# Altium PCB sync_rectification_module.PcbDoc
Units mm, origin at the board's own origin, x right, y up, seen from the top; angles counter-clockwise.
Board outline 38 x 33 mm, 2 copper layers (Top Layer, Bottom Layer), stack 1.636 mm thick; 17 components, 16 nets, 76 pads, 40 vias.
Unrouted connection lines stored in the file: 19.
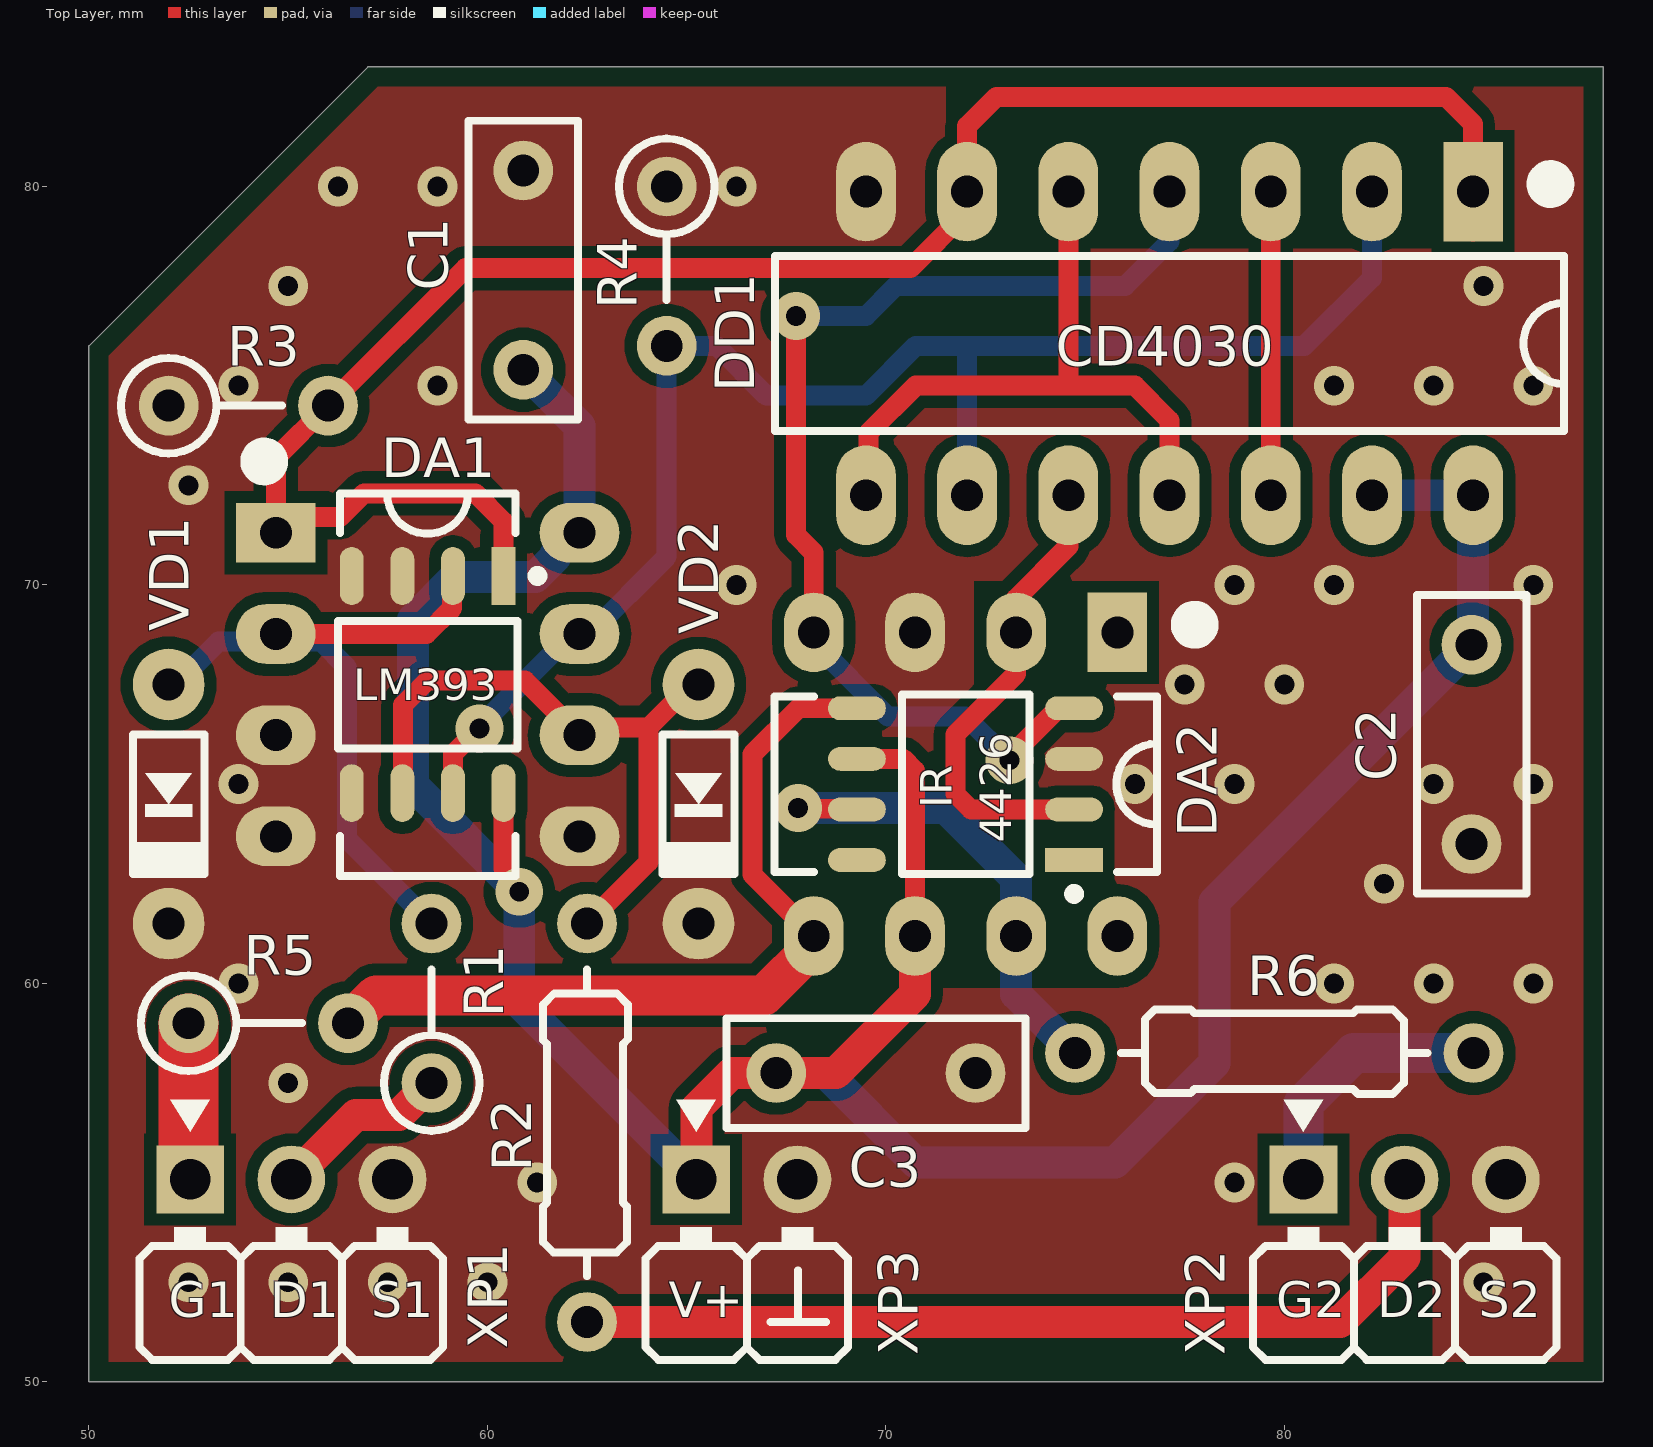
[diagram p0: Top Layer view]
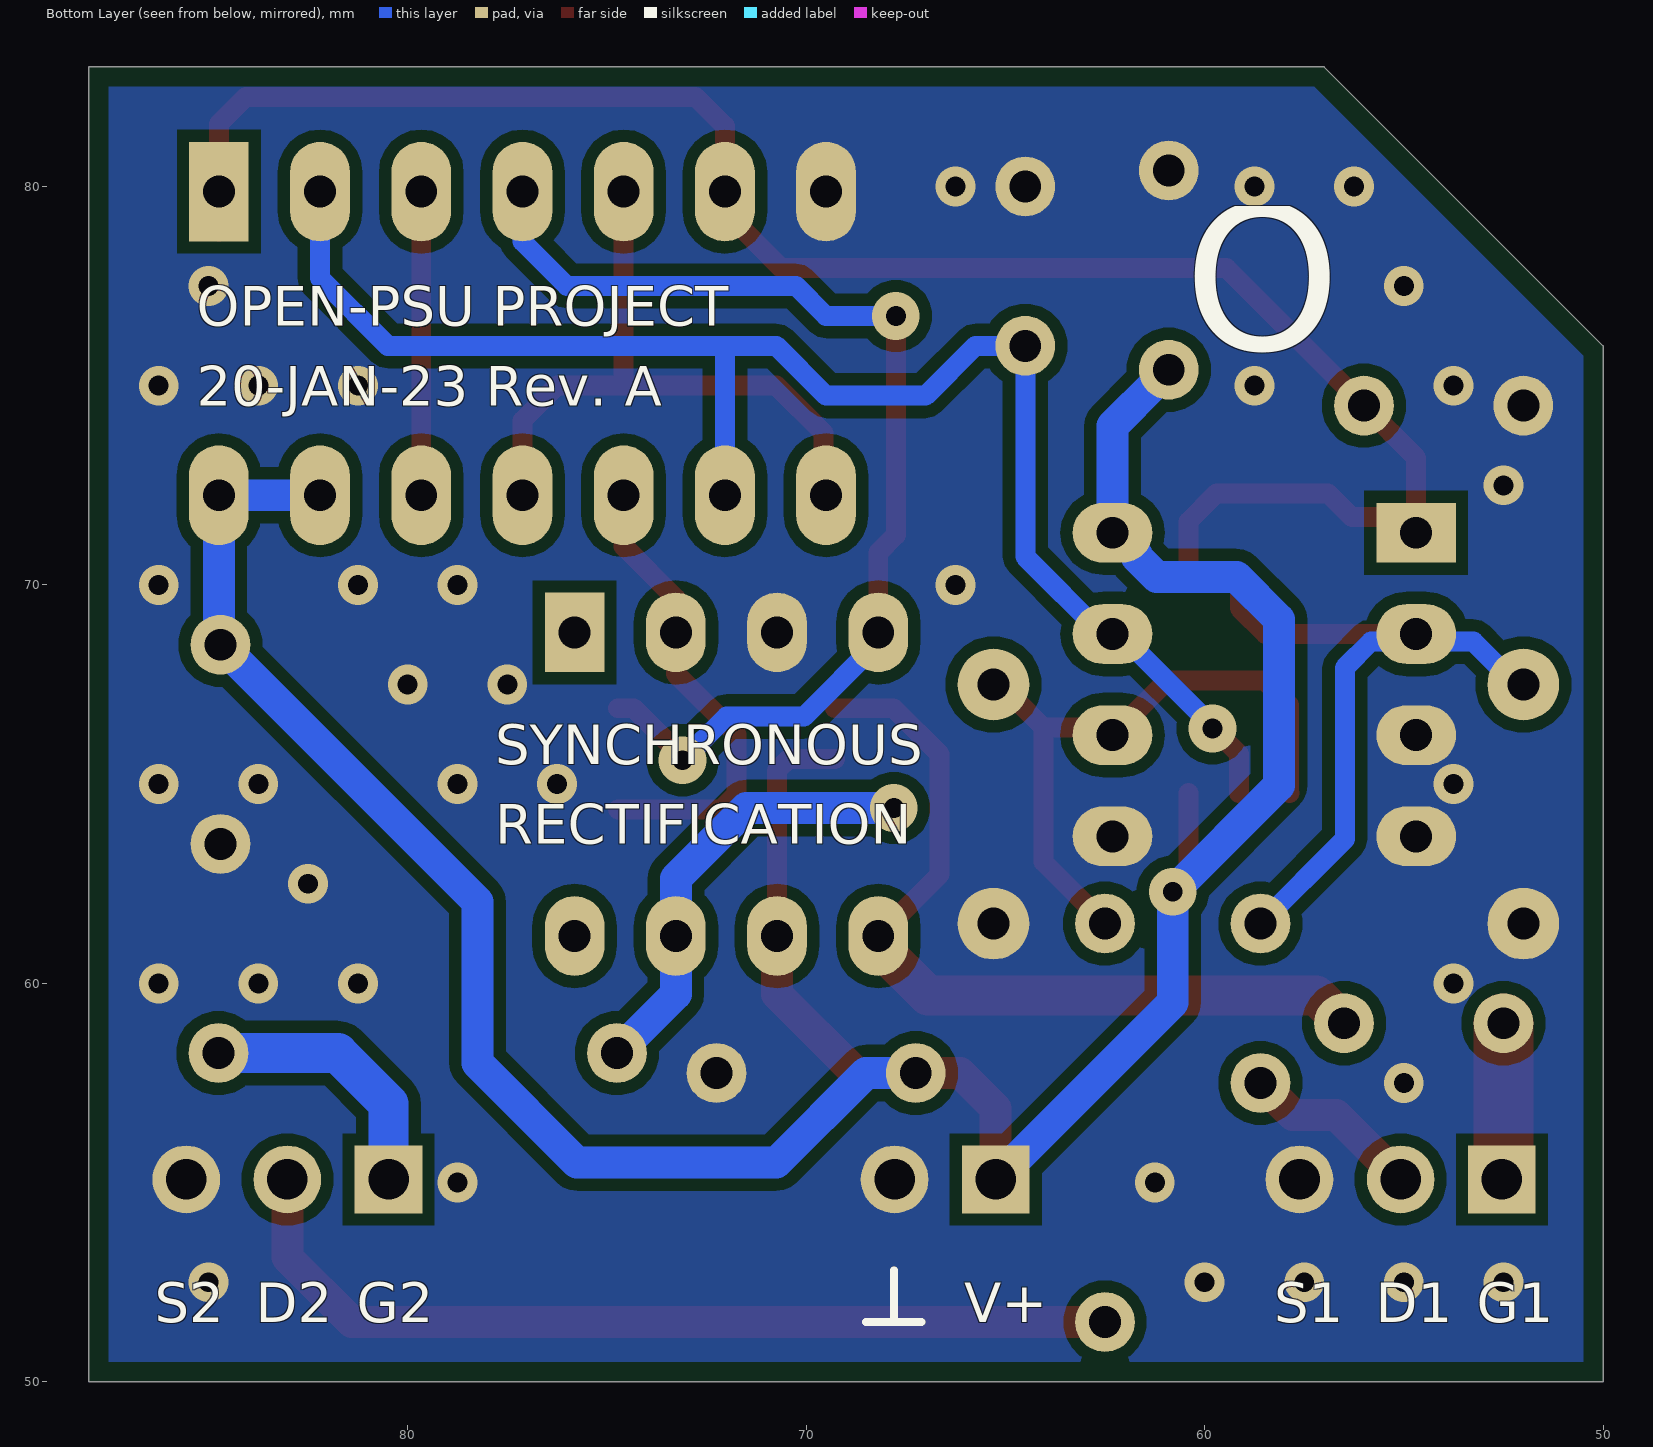
[diagram p1: Bottom Layer view, seen from below]
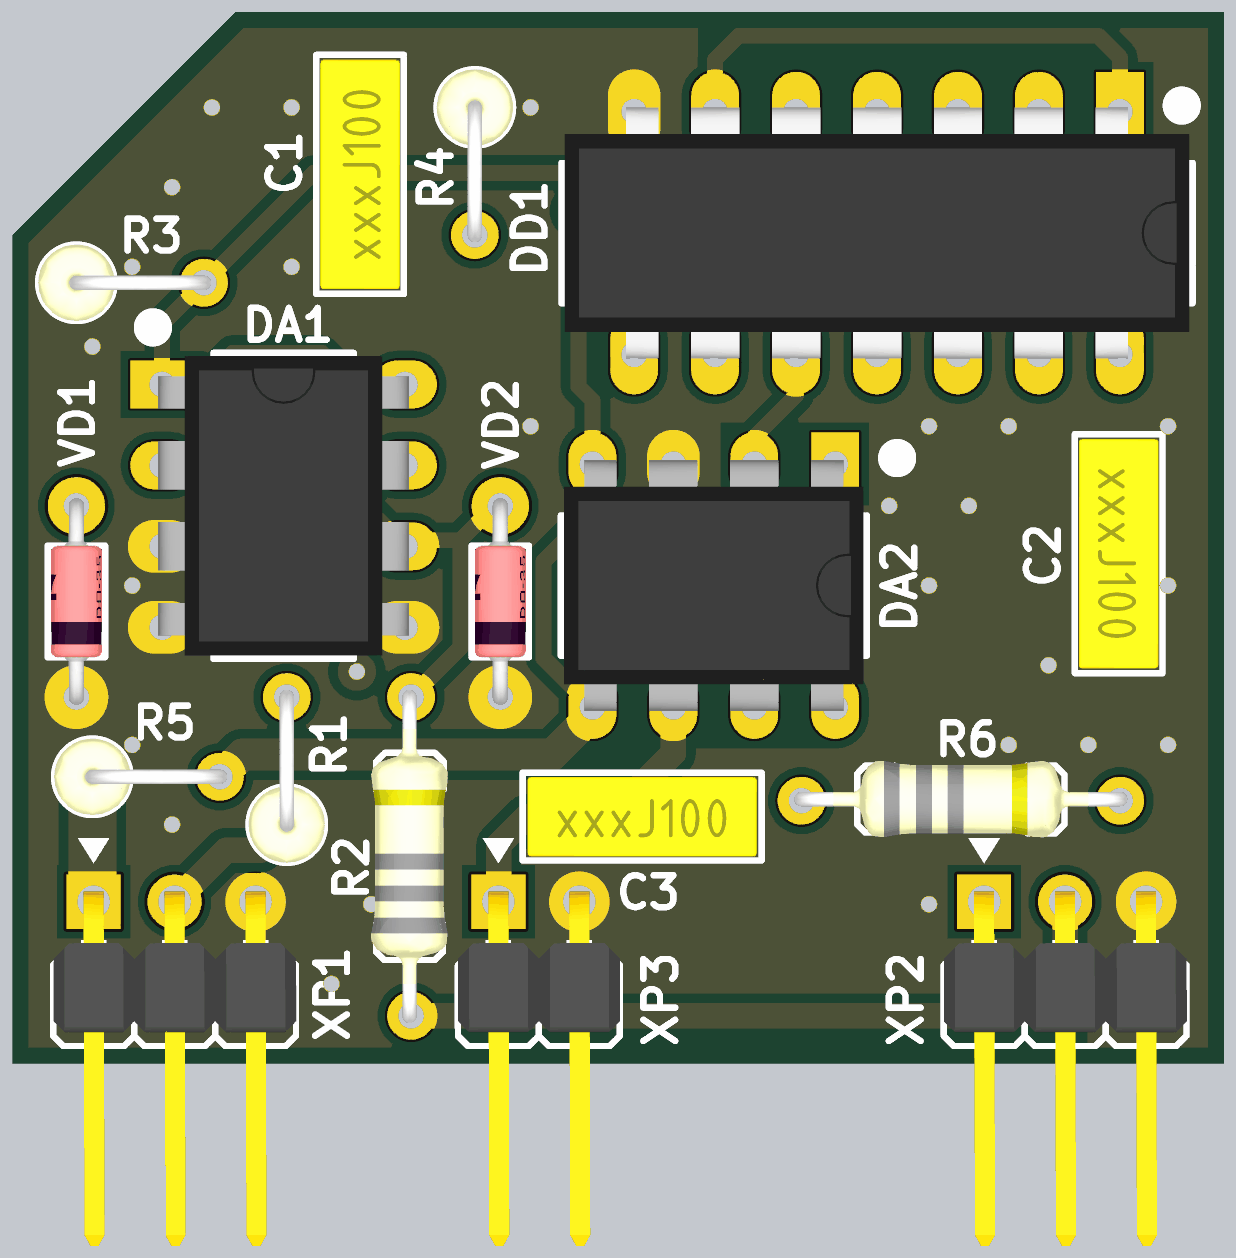
[diagram p2: 3D render of the assembled board from above, using the file's embedded part models]

## Layer stack, top to bottom
Top Solder: solder mask 0.025, Solder Resist, Dk 3.5
Top Layer: signal copper 0.018
Dielectric 1: dielectric 1.6, FR-4, Dk 4.8
Bottom Layer: signal copper 0.018
Bottom Solder: solder mask 0.025, Solder Resist, Dk 3.5

## Board outline
50,50 50,76 57,83 88,83 88,50

## Design rules (kind name [scope] priority, off if disabled: settings)
Clearance [All] p1: gap=0.3 ignorepadtopadclearanceinfootprint=FALSE
PlaneClearance [All] p1: clearance=0.5
PlaneConnect [All] p1: planeconnectstyle=Direct reliefexpansion=0.508 reliefentries=4 reliefconductorwidth=0.254 reliefairgap=0.254
PolygonConnect [All] p1: connectstyle=Direct reliefconductorwidth=0.254 reliefentries=4 polygonreliefangle="90 Angle" airgapwidth=0.254
RoutingVias [All] p1: holewidth=0.5 width=1 viastyle="Through Hole" minholewidth=0.5 minwidth=1 maxholewidth=5 maxwidth=2.5
SilkToSilkClearance [All] p1: silktosilkclearance=0.2
SilkToSolderMaskClearance [IsPad] p1: minsilkscreentomaskgap=0.2 clearancetoexposedcopper=TRUE
SolderMaskExpansion [All] p1: expansion=0.1 istentingtop=FALSE
Width [All] p1: maxlimit=2.5 minlimit=0.3 preferedwidth=0.5 minimp=50.000000 maximp=50.000000 favimp=50.000000
26 further rules are at their usual default settings.

## Components (designator, comment, footprint, x,y, rotation, side; value= is the part's Value field where it differs from the comment)
C1 "0.1u" CL23B_7.2x2.5 60.9,77.9 r90 top
C2 "0.1u" CL23B_7.2x2.5 84.7,66 r270 top
C3 "0.1u" CL23B_7.2x2.5 69.75,57.75 r0 top
DA1 "LM393P" DIP-8P-M01_with_SO8 58.5,67.5 r0 top
DA2 "IR4426PbF" DIP-8P-M01_with_SO8 72,65 r270 top
DD1 "CD4030BE" DIP-14P-M02 77.12,76.06 r270 top
R1 "2k" CFR-25(VERTICAL) 58.6,59.5 r270 top
R2 "2k" CFR-25 62.5,56.5 r90 top
R3 "4.7k" CFR-25(VERTICAL) 54,74.5 r180 top
R4 "4.7k" CFR-25(VERTICAL) 64.5,78 r90 top
R5 "3.6" CFR-25(VERTICAL) 54.5,59 r180 top
R6 "3.6" CFR-25 79.75,58.25 r0 top
VD1 "1N4148" "DO-35 GLASS LIGHT RED" 52,64.5 r90 top
VD2 "1N4148" "DO-35 GLASS LIGHT RED" 65.3,64.5 r90 top
XP1 "PLS-3R" PLS-3R 52.54,55.08 r0 top
XP2 "PLS-3R" PLS-3R 80.48,55.08 r0 top
XP3 "PLS-2R" PLS-2R 65.24,55.08 r0 top

## Footprints (in the part's own frame and the unit in brackets; to place one, negate y for a bottom-side part, rotate by r counter-clockwise, add the part's x,y. Pads: shape width x height; smd on the part's side, far side on the other; paste and mask are expansions set on the pad)
CFR-25 [mm] "Carbon Film Resistors 1/4W"
  round 1.5 hole 0.8 mask+0.075: 1(-5,0) 2(5,0)
  silkscreen extent -3.85,-1.02 3.85,1.1, body extent -5.23,-1.15 5.22,1.25, height 3.7
CFR-25(VERTICAL) [mm] "Carbon Film Resistors 1/4W"
  round 1.5 hole 0.8 mask+0.075: 1(-2,0) 2(2,0)
  silkscreen extent -0.85,-1.2 3.2,1.2, body extent -2.23,-1.2 3.2,1.2, height 9.84
CL23B_7.2x2.5 [mm] "Box-type 7.2x2.5x6.5mm"
  round 1.5 hole 0.8 mask+0.075: 1(-2.5,0) 2(2.5,0)
  silkscreen extent -3.75,-1.38 3.75,1.38, body extent -3.6,-1.25 3.6,1.25, height 6.55
DIP-8P-M01_with_SO8 [mm] "Plastic DIP, 8 pin, lead pitch 2.54mm (0.1\"), row spacing 7.62mm (0.3\")."
  rect 2x1.5 hole 0.8 mask+0.075: 1(-3.81,3.81)
  rect 0.6x1.45 smd paste+0 mask+0.05: 1(1.905,2.725)
  oval 2x1.5 hole 0.8 mask+0.075: 2(-3.81,1.27) 3(-3.81,-1.27) 4(-3.81,-3.81) 5(3.81,-3.81) 6(3.81,-1.27) 7(3.81,1.27) 8(3.81,3.81)
  oval 0.6x1.45 smd paste+0 mask+0.05: 2(0.635,2.725) 3(-0.635,2.725) 4(-1.905,2.725) 5(-1.905,-2.725) 6(-0.635,-2.725) 7(0.635,-2.725) 8(1.905,-2.725)
  silkscreen extent -4.4,-4.8 2.88,5.9, body extent -3.94,-4.7 3.93,4.7, height 4.36
DIP-14P-M02 [mm] "Plastic DIP, 14 pin, lead pitch 2.54mm (0.1\"), row spacing 7.62mm (0.3\")"
  rect 2.5x1.5 hole 0.8 mask+0.075: 1(-3.81,7.62)
  oval 2.5x1.5 hole 0.8 mask+0.075: 2(-3.81,5.08) 3(-3.81,2.54) 4(-3.81,0) 5(-3.81,-2.54) 6(-3.81,-5.08) 7(-3.81,-7.62) 8(3.81,-7.62) 9(3.81,-5.08) 10(3.81,-2.54) 11(3.81,0) 12(3.81,2.54) 13(3.81,5.08) 14(3.81,7.62)
  silkscreen extent -4.3,-9.9 2.2,9.9, body extent -3.94,-9.8 3.93,9.8, height 4.36
"DO-35 GLASS LIGHT RED" [mm]
  round 1.8 hole 0.8: 1(-3,0) 2(3,0)
  silkscreen extent -1.75,-0.9 1.75,0.95, body extent -3.24,-0.8 3.24,0.8, height 2.3
PLS-2R [mm]
  rect 1.7x1.7 hole 1.02: 1(0,0)
  round 1.7 hole 1.02: 2(2.54,0)
  silkscreen extent -1.27,-4.53 3.81,1.99, body extent -1.27,-10.8 3.82,0.32, height 3.09
PLS-3R [mm]
  rect 1.7x1.7 hole 1.02: 1(0,0)
  round 1.7 hole 1.02: 2(2.54,0) 3(5.08,0)
  silkscreen extent -1.27,-4.53 6.35,1.99, body extent -1.27,-10.8 6.36,0.32, height 3.09

## Part data
C1 C2 C3: library part CL23B, "Box-type metallized polyester film capacitor", Dielectric=Polyester, Tolerance="± * %", Voltage=63V, Package=CL23B, Value on schem=0.1u
DA1: "Dual Comparator", Manufacturer="Texas Instruments", Package=DIP-8, Part Number=LM393P
DA2: "DUAL LOW SIDE DRIVER", Manufacturer="International Rectifier", Package=SOIC-8, Part Number=IR4426PbF
DD1: "Quad XOR-Gate", Manufacturer="Texas Instruments", Package=DIP-14, Part Number=CD4030BE
R1 R2: library part CF25, "Resistor 1/4W", Manufacturer=Yageo, Package=1/4, Part Number=MFR-25FTF52-2K, Temperature coefficient="±100 ppm/°C", Tolerance="± 1 %", Voltage=250V, Value on schem=2k
R3 R4: library part CF25, "Resistor 1/4W", Manufacturer=Yageo, Package=1/4, Part Number=MFR-25FTF52-4K7, Temperature coefficient="±100 ppm/°C", Tolerance="± 1 %", Voltage=250V, Value on schem=4.7k
R5 R6: library part CF25, "Resistor 1/4W", Manufacturer=Yageo, Package=1/4, Part Number=MFR-25FTF52-3R6, Temperature coefficient="±100 ppm/°C", Tolerance="± 1 %", Voltage=250V, Value on schem=3.6
VD1 VD2: "High-speed diode", Package=DO-35, Part Number=1N4148

## Via types
v1: diameter 1, hole 0.5, Top Layer to Bottom Layer, tented both sides, 35 vias
v2: diameter 1.2, hole 0.5, Top Layer to Bottom Layer, tented both sides, 5 vias

## Nets (pads, with @x,y where several pads share a name; then routed paths per layer and width w, separated by ;. In a path a pad name is that pad's centre, name@x,y a point inside that pad or via, vN(x,y) a via of type N, cw(c..) or ccw(c..) an arc to the next point about the centre after c; other vN are vias at no path point)
D1: R1.2 XP1.2 | length 4.5
  Top Layer w0.8: XP1.2 56.695,56.695 57.781,56.695 R1.2@58.587,57.5
D2: R2.1 XP2.2 | length 23.2
  Top Layer w0.8: R2.1 81.4,51.5 83.02,53.12 XP2.2
G1: R5.2 XP1.1 | length 3.9
  Top Layer w1.5: R5.2 52.5,55.12 XP1.1
G2: R6.2 XP2.1 | length 6.7
  Top Layer w1: XP2.1 XP2.1@80.49,55.09
  Bottom Layer w1: XP2.1 80.48,56.98 81.75,58.25 R6.2
GND: C1.2 C2.2 C3.2 DA1.3 DA1.4 DA1.5 DA2.3 DD1.7 R3.2 R4.2 VD1.1 VD2.1 XP1.3 XP2.3 XP3.2
  other v1: 52.5,52.5 55,52.5 57.5,52.5 60,52.5 85,52.5 61.25,55 78.75,55 55,57.5 53.75,60 81.25,60 83.75,60 86.25,60 82.5,62.5 53.75,65 76.25,65 78.75,65 83.75,65 86.25,65 77.5,67.5 80,67.5 66.25,70 78.75,70 81.25,70 86.25,70 52.5,72.5 53.75,75 58.75,75 81.25,75 83.75,75 86.25,75 55,77.5 85,77.5 56.25,80 58.75,80 66.25,80
NetDA1_1: DA1.1 DD1.1 DD1.6 R3.1 | length 47.1
  Top Layer w0.5: DA1.1@60.405,70.225 60.405,71.595 59.7,72.3 56.9,72.3 56.3,71.7 55.08,71.7 54.69,71.31 54.69,73.19 R3.1 59.45,77.95 70.62,77.95 DD1.6@72.04,79.37 ; DD1.6 72.04,81.513 72.777,82.25 84.056,82.25 84.74,81.566 DD1.1 ; DD1.1@84.49,79.62 84.74,79.37 DD1.1@84.74,78.87
NetDA1_2: DA1.2 R1.1 VD1.2 | length 18.4
  Top Layer w0.5: DA1.2@54.69,68.77 58.47,68.77 59.116,69.416 59.116,70.206 DA1.2@59.135,70.225
  Bottom Layer w0.5: VD1.2 52.176,67.5 53.255,68.579 54.499,68.579 54.69,68.77 54.881,68.579 55.821,68.579 56.481,67.919 56.481,63.619 R1.1 ; R1.1@58.8,61.7 R1.1@59,61.5
NetDA1_6: DA1.6 R2.2 VD2.2 | length 16.5
  Top Layer w0.5: DA1.6@57.865,64.775 57.884,64.794 57.884,66.984 58.5,67.6 60.94,67.6 62.31,66.23 62.501,66.421 64.045,66.421 ; R2.2 64.045,63.045 64.045,66.421 ; VD2.2 65.124,67.5 64.045,66.421
NetDA1_7: DA1.7 DD1.2 DD1.9 R4.1 | length 39.1
  Top Layer w0.5: DA1.7@59.135,64.775 59.135,65.757 59.778,66.4 v2(59.8,66.4)
  Bottom Layer w0.5: v2(59.8,66.4) 59.8,66.455 62.115,68.77 62.31,68.77 62.56,68.77 64.5,70.71 R4.1 65.75,76 67,74.75 69.5,74.75 70.75,76 72.04,76 ; DD1.9@72.04,73 72.04,76 ; DD1.2@82.2,80.62 82.2,77.7 80.5,76 72.04,76
NetDA2_2: DA2.2 DD1.10 | length 11.8
  Top Layer w0.5: DD1.10 74.58,70.971 73.27,69.661 73.27,68.81 73.27,67.77 71.75,66.25 71.75,64.75 72.135,64.365 DA2.2@74.725,64.365
NetDA2_4: DA2.4 DD1.4 | length 28.9
  Top Layer w0.5: v2(67.75,76.75) 67.75,71.25 68.19,70.81 DA2.4@68.19,68.81 ; v2(73.1,65.6) 73.1,65.678 74.327,66.905 DA2.4@74.725,66.905
  Bottom Layer w0.5: v2(67.75,76.75) 69.5,76.75 70.25,77.5 76,77.5 77.12,78.62 DD1.4 DD1.4@77.12,80.62 ; DA2.4@68.19,68.81 68.19,68.56 70.05,66.7 72,66.7 v2(73.1,65.6)
NetDA2_5: DA2.5 R5.1 | length 21
  Top Layer w0.5: DA2.5@68.19,61.19 66.65,62.73 66.65,65.75 67.805,66.905 DA2.5@69.275,66.905
  Top Layer w1: R5.1 57.2,59.7 66.95,59.7 68.19,60.94 DA2.5@68.19,61.19
NetDA2_7: DA2.7 R6.1 | length 12.7
  Top Layer w0.5: v2(67.8,64.4) 67.817,64.383 69.258,64.383 DA2.7@69.275,64.365
  Bottom Layer w0.8: v2(67.8,64.4) 71.504,64.4 73.27,62.634 73.27,61.19 73.27,59.73 R6.1
NetDD1_3: DD1.3 DD1.12 | length 7.6
  Top Layer w0.5: DD1.12@79.66,71.25 DD1.3@79.66,78.87
NetDD1_5: DD1.5 DD1.8 DD1.11 | length 17.6
  Top Layer w0.5: DD1.8@69.5,71.25 69.5,71.75 DD1.8@69.75,72 ; DD1.8 69.561,72.311 69.561,73.811 70.75,75 74.58,75 ; DD1.5 74.58,75 ; DD1.11 77.12,74.13 76.25,75 74.58,75
VCC_STANDBY_12V0P: C1.1 C2.1 C3.1 DA1.8 DA2.6 DD1.13 DD1.14 XP3.1 | length 76.6
  Top Layer w0.5: 60.405,62.884 DA1.8@60.405,64.775 ; DA2.6@69.275,65.635 70.437,65.635 70.73,65.342 DA2.6@70.73,61.19
  Top Layer w0.8: XP3.1 65.25,55.09 65.25,56.865 66.135,57.75 C3.1 68.75,57.75 70.73,59.73 DA2.6@70.73,61.19
  Bottom Layer w0.8: C1.1@60.9,75.1 61.2,75.1 62.31,73.99 62.31,71.31 62.249,71.31 61.71,70.771 61.71,70.71 61.2,70.2 59.2,70.2 58.135,69.135 58.135,64.965 v2(60.8,62.3) 60.8,59.52 XP3.1 ; C3.1 68.5,57.75 70.75,55.5 75.75,55.5 78.25,58 78.25,62.05 C2.1 84.74,68.54 DD1.14 DD1.13
pads on no net: DA2.1 DA2.8

## Polygon pours and split planes (outlines as drawn)
GND on Bottom Layer "NONET_L-01_P-001" (solid, remove dead copper, pour order 0): 50.5,50.5 87.5,50.5 87.5,82.5 57.25,82.5 50.5,75.75
GND on Top Layer "NONET_L-01_P-001" (solid, remove dead copper, pour order 1): 50.5,50.5 87.5,50.5 87.5,82.5 57.25,82.5 50.5,75.75

## Other copper
Top Layer:
  pour cut-out: 71.101,64.365 71.101,59.881 75.75,59.881 75.75,64.365
  pour cut-out: 72.211,70.11 72.211,67.51 76.86,67.51 76.86,70.11
  pour cut-out: 84,82.5 84,78.44 71.5,78.44 71.5,82.5
  pour cut-out: 83.726,54.16 83.726,50.1 82.314,50.1 82.314,54.16

## Silkscreen, mask and mechanical layers (free items; w line width, h text height)
Top Overlay:
  lines w0.2: 67.1,51.5 68.5,51.5 ; 67.8,51.5 67.8,52.8
  text "CD4030" at 74.268,75.5 h1
  text "LM393" at 56.634,67.1 h0.8
  text "IR" at 71.65,64.4 h0.8 r90
  text "4426" at 73.15,63.534 h0.8 r90
  text "G1" at 52.005,51.62 h0.9
  text "D1" at 54.545,51.62 h0.9
  text "S1" at 57.085,51.62 h0.9
  text "V+" at 64.555,51.62 h0.9
  text "G2" at 79.795,51.62 h0.9
  text "D2" at 82.335,51.62 h0.9
  text "S2" at 84.875,51.62 h0.9
Bottom Overlay:
  lines w0.2: 67.1,51.5 68.5,51.5 ; 67.8,51.5 67.8,52.8
  text "OPEN-PSU PROJECT" at 85.3,76.5 h1
  text "20-JAN-23 Rev. A" at 85.3,74.5 h1
  text "O" at 60.518,74.01 h10
  text "SYNCHRONOUS" at 77.8,65.5 h1
  text "RECTIFICATION" at 77.8,63.5 h1
  text "G1" at 53.166,51.5 h1
  text "D1" at 55.706,51.5 h1
  text "S1" at 58.246,51.5 h1
  text "V+" at 66.033,51.5 h1
  text "G2" at 81.273,51.5 h1
  text "D2" at 83.813,51.5 h1
  text "S2" at 86.353,51.5 h1
Outline:
  the board outline again, w0.2